# Altium PCB Mother Board.PcbDoc
Units mil, origin at the board's own origin, x right, y up, seen from the top; angles counter-clockwise.
Board outline 1840 x 4900 mil, 4 copper layers (Top Layer, Layer 1, Layer 2, Bottom Layer), stack 23.756 mil thick; 34 components, 33 nets, 379 pads, 98 vias.
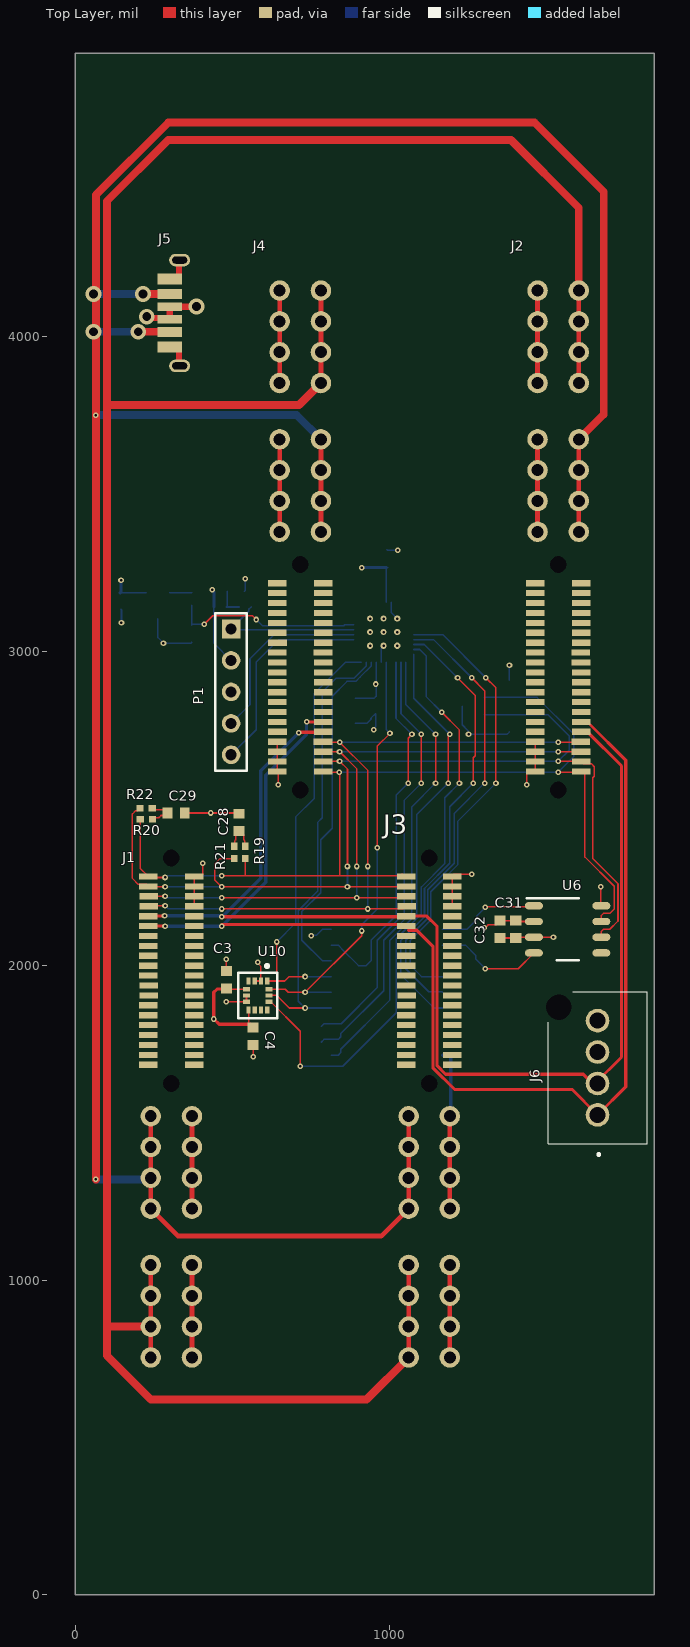
[diagram p0: Top Layer view]
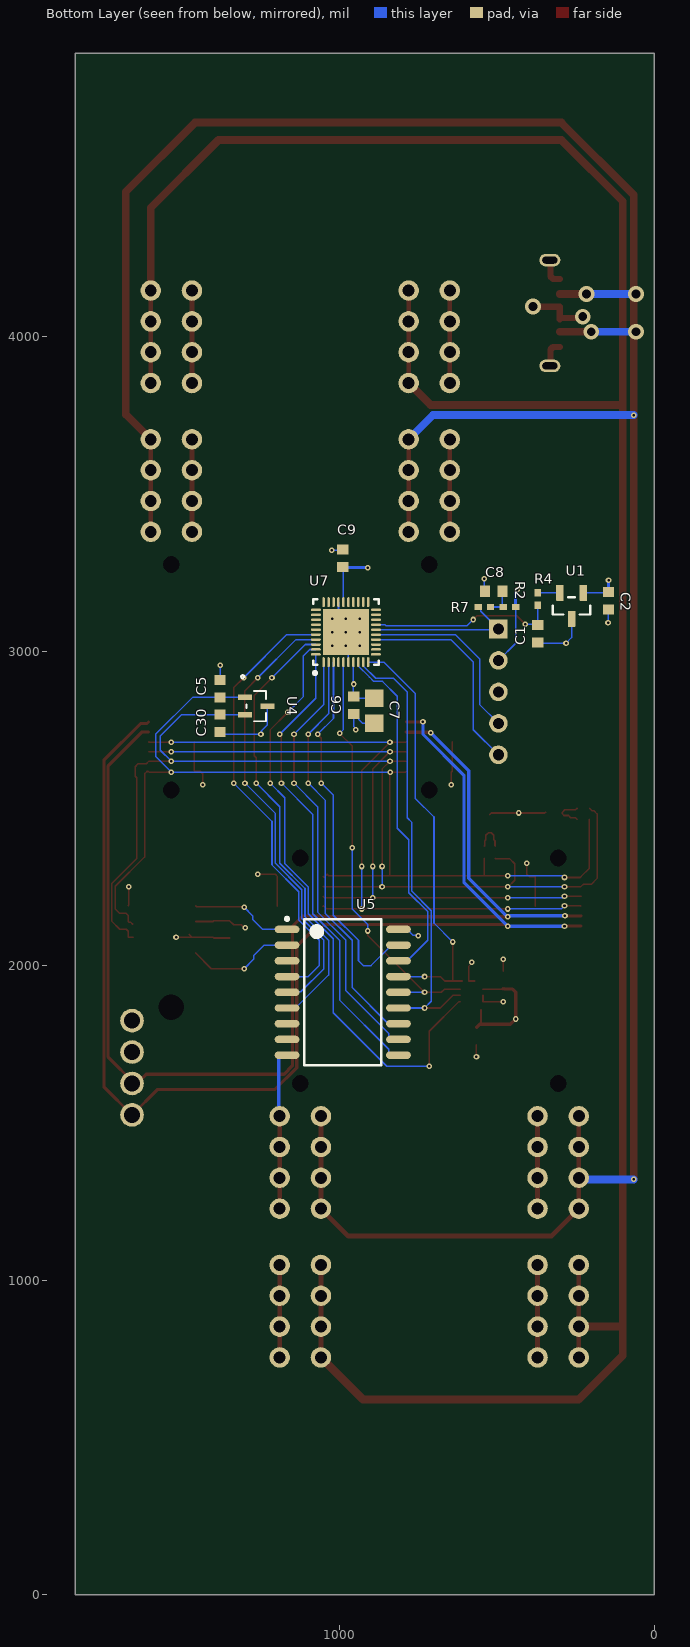
[diagram p1: Bottom Layer view, seen from below]
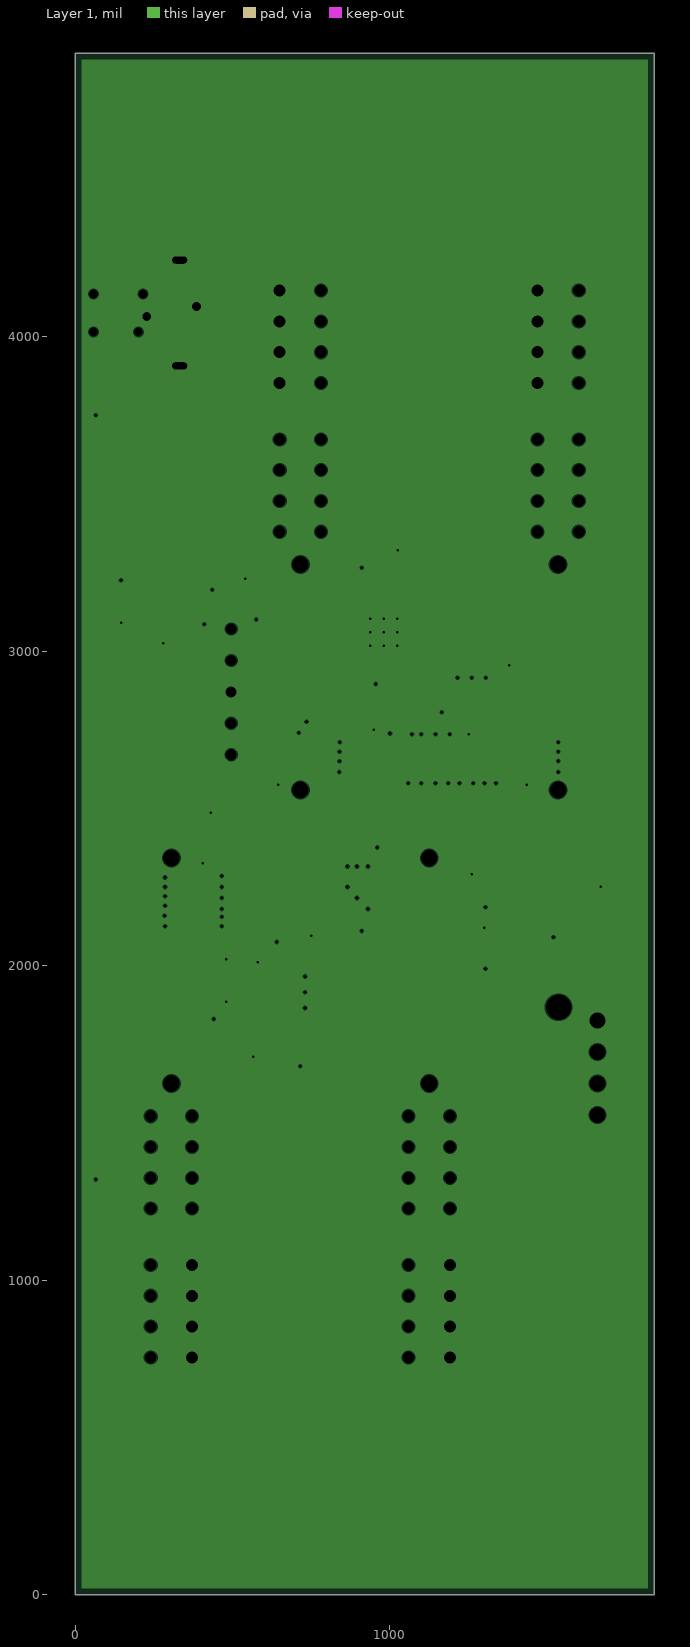
[diagram p2: Layer 1, clearances drawn from the general rule]
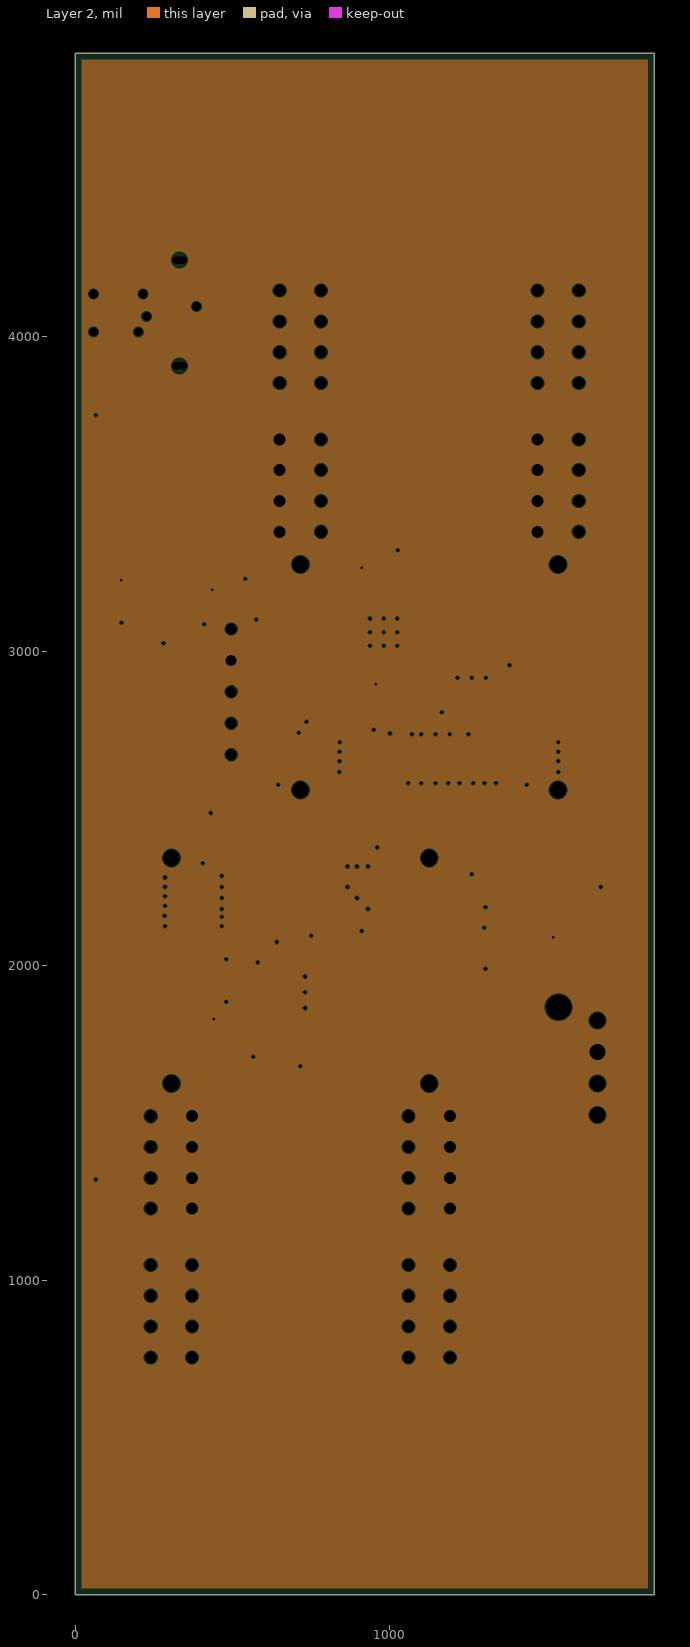
[diagram p3: Layer 2, clearances drawn from the general rule]

## Layer stack, top to bottom
Top Solder: solder mask 0.4, Solder Resist, Dk 3.5
Top Layer: signal copper 1.4
Dielectric 2: prepreg 2.8, PP-006, Dk 4.1
Layer 1: plane copper 1.378, net GND
Dielectric 1: dielectric 12.6, FR-4, Dk 4.8
Layer 2: plane copper 1.378, net 3V3
Dielectric 3: prepreg 2.8, PP-006, Dk 4.1
Bottom Layer: signal copper 1.4
Bottom Solder: solder mask 0.4, Solder Resist, Dk 3.5

## Board outline
0,0 1840,0 1840,4900 0,4900

## Design rules (kind name [scope] priority, off if disabled: settings)
BoardOutlineClearance [All] p1: gap=7.87 ignorepadtopadclearanceinfootprint=FALSE
Clearance [All] p1: gap=3.54 ignorepadtopadclearanceinfootprint=FALSE except(5: Arc-Via Track-Via SMDPad-Via THPad-Via Via-Via Via-Fill Via-Poly Via-Region Via-Text; 9.84: Arc-Hole Track-Hole SMDPad-Hole THPad-Hole Via-Hole Fill-Hole Poly-Hole Region-Hole Text-Hole)
ComponentClearance [All] p1: gap=3.5 collisioncheckmode=3 verticalgap=3.5 showdistances=TRUE
DiffPairsRouting 120OhmDiffPairs [InDifferentialPairClass('120Ohm')] p1: maxlimit=5 minlimit=5 mostfreqgap=5 toplayer_minwidth=2.63 toplayer_maxwidth=2.63 toplayer_prefwidth=2.63 bottomlayer_minwidth=2.63 bottomlayer_maxwidth=2.63 bottomlayer_prefwidth=2.63 impedanceprofiledriven=TRUE impedanceprofileid={E287B070-1990-45AA-885F-49F5262516A6} maxuncoupledlength=500
DiffPairsRouting 100OhmDiffPairs [InDifferentialPairClass('100Ohm')] p2: maxlimit=5 minlimit=5 mostfreqgap=5 toplayer_minwidth=4.51 toplayer_maxwidth=4.51 toplayer_prefwidth=4.51 bottomlayer_minwidth=4.51 bottomlayer_maxwidth=4.51 bottomlayer_prefwidth=4.51 impedanceprofiledriven=TRUE impedanceprofileid={2AE41D91-29D4-4592-BCE6-4F755B01D198} maxuncoupledlength=500
DiffPairsRouting 90OhmDiffPairs [InDifferentialPairClass('90Ohm')] p3: maxlimit=5 minlimit=5 mostfreqgap=5 toplayer_minwidth=5.85 toplayer_maxwidth=5.85 toplayer_prefwidth=5.85 bottomlayer_minwidth=5.85 bottomlayer_maxwidth=5.85 bottomlayer_prefwidth=5.85 impedanceprofiledriven=TRUE impedanceprofileid={0AC2A555-4B6F-4755-A2BA-0C0075E72B6B} maxuncoupledlength=500
DiffPairsRouting [All] p4: maxlimit=3.54 minlimit=3.54 mostfreqgap=3.54 toplayer_minwidth=3.54 toplayer_maxwidth=71497.94 toplayer_prefwidth=3.54 bottomlayer_minwidth=3.54 bottomlayer_maxwidth=71497.94 bottomlayer_prefwidth=3.54 maxuncoupledlength=500
Height [All] p1: minheight=0 maxheight=71497.94 prefheight=500
HoleSize [All] p1: absolutevalues=TRUE maxlimit=248.03 minlimit=7.87 maxpercent=80.000 minpercent=20.000
HoleToHoleClearance [All] p1: gap=9.84 allowstackedmicrovias=FALSE
MinimumAnnularRing [All] p1: minimumring=3
MinimumSolderMaskSliver [All] p1: minsoldermaskwidth=0
PlaneClearance [All] p1: clearance=3.5
PlaneConnect PlaneConnectPowerPads [InPadClass('PowerPads')] p1: planeconnectstyle=Direct reliefexpansion=20 reliefentries=4 reliefconductorwidth=10 reliefairgap=10
PlaneConnect [All] p2: pad.planeconnectstyle=Relief pad.reliefexpansion=11.81 pad.reliefentries=4 pad.reliefconductorwidth=3.5 pad.reliefairgap=3.5 via.planeconnectstyle=Direct via.reliefexpansion=11.81 via.reliefentries=4 via.reliefconductorwidth=5 via.reliefairgap=5
PolygonConnect PolygonConnectPowerPads [All vs (InPadClass('PowerPads'))] p1: connectstyle=Direct reliefconductorwidth=10 reliefentries=4 polygonreliefangle="90 Angle" airgapwidth=10
PolygonConnect [All] p2: thpad.connectstyle=Relief thpad.reliefconductorwidth=3.5 thpad.reliefentries=4 thpad.polygonreliefangle="90 Angle" thpad.airgapwidth=3.5 smdpad.connectstyle=Relief smdpad.reliefconductorwidth=3.5 smdpad.reliefentries=4 smdpad.polygonreliefangle="90 Angle" smdpad.airgapwidth=3.5 via.connectstyle=Direct via.reliefconductorwidth=5 via.reliefentries=4 via.polygonreliefangle="90 Angle" via.airgapwidth=5
ReturnPath 120OhmReturn [InDifferentialPairClass('120Ohm')] p1: impedanceprofileid={E287B070-1990-45AA-885F-49F5262516A6} _gaplimit=0 _useantipads=TRUE
ReturnPath 100OhmReturn [InDifferentialPairClass('100Ohm')] p2: impedanceprofileid={2AE41D91-29D4-4592-BCE6-4F755B01D198} _gaplimit=0 _useantipads=TRUE
ReturnPath 90OhmReturn [InDifferentialPairClass('90Ohm')] p3: impedanceprofileid={0AC2A555-4B6F-4755-A2BA-0C0075E72B6B} _gaplimit=0 _useantipads=TRUE
ReturnPath 60OhmReturn [InNetClass('60Ohm')] p4: impedanceprofileid={AA7C0548-6338-4AC9-AD2A-66174299CF1B} _gaplimit=0 _useantipads=TRUE
ReturnPath 50OhmReturn [InNetClass('50Ohm')] p5: impedanceprofileid={38A28C89-5808-4632-B31D-CFF1778F07F1} _gaplimit=0 _useantipads=TRUE
RoutingVias [All] p1: holewidth=7.87 width=17.72 viastyle="Through Hole" minholewidth=7.87 minwidth=17.72 maxholewidth=248.03 maxwidth=257.87
SilkToSilkClearance [All] p1: silktosilkclearance=0
SilkToSolderMaskClearance [IsPad] p1: minsilkscreentomaskgap=3.5 clearancetoexposedcopper=TRUE
SolderMaskExpansion ViaSolderMaskExpansion [IsVia] p1: expansion=4 istentingtop=TRUE
SolderMaskExpansion [All] p2: expansion=2.95 istentingtop=FALSE
Width 60OhmWidth [InNetClass('60Ohm')] p1: maxlimit=4.59 minlimit=4.59 preferedwidth=4.59 impedanceprofiledriven=TRUE impedanceprofileid={AA7C0548-6338-4AC9-AD2A-66174299CF1B} minimp=50.000000 maximp=50.000000 favimp=50.000000
Width 50OhmWidth [InNetClass('50Ohm')] p2: maxlimit=6.79 minlimit=6.79 preferedwidth=6.79
Width [All] p3: maxlimit=71497.94 minlimit=3.54 preferedwidth=3.54 minimp=50.000000 maximp=50.000000 favimp=50.000000
20 further rules are at their usual default settings.

## Classes and differential pairs
component class Designator: C28 C29 J1 J2 J3 J4 J5 J6 R19 R20 R21 R22
component class Designator3: *3_3
component class Designator2: *3_2
component class Designator1: *3_1

## Components (designator, comment, footprint, x,y, rotation, side; value= is the part's Value field where it differs from the comment)
C1 "Cap" 1608[0603] 370,3055 r270 bottom value=680pF
C2 "Cap" 1608[0603] 145,3160 r270 bottom value=100nF
C3 "Cap" 1608[0603] 480,1955 r270 top value=100nF
C4 "Cap" 1608[0603] 565,1775 r90 top value=100nF
C5 "Cap" 1608[0603] 1380,2880 r270 bottom value=100nF
C6 "Cap" 1608[0603] 955,2827.44 r90 bottom value=100nF
C7 "Cap" 6-0805_M 890,2810 r90 bottom value=10uF
C8 "Cap" 1608[0603] 510,3190 r180 bottom value=10nF
C9 "Cap" 1608[0603] 990,3295 r270 bottom value=100nF
C28 "Cap" 1608[0603] 520,2455 r90 top value=1nF
C29 "Cap" 1608[0603] 320,2485 r180 top value=1nF
C30 "Cap" 1608[0603] 1380,2770 r90 bottom value=100nF
C31 "Cap" 1608[0603] 1400,2115 r90 top value=100nF
C32 "Cap" 1608[0603] 1350,2115 r270 top value=1nF
J1 "HSEC8-120-01-L-PV-4-1" HSEC8-120-01-L-PV-4-1 305,1625 r90 top
J2 "HSEC8-120-01-L-PV-4-1" HSEC8-120-01-L-PV-4-1 1535,3275 r270 top
J3 "HSEC8-120-01-L-PV-4-1" HSEC8-120-01-L-PV-4-1 1125,1625 r90 top
J4 "HSEC8-120-01-L-PV-4-1" HSEC8-120-01-L-PV-4-1 715,3275 r270 top
J5 "USB4130-GF-C" USB4130-GF-C 331.5,4074.68 r270 top
J6 "2-644486-4" 26444864 1660,1525 r90 top locked
P1 "Header 5" HDR1X5 495,3070 r270 top
R2 "Res1" 0402-A 460,3140 r180 bottom value=10k
R4 "Res1" 0402-A 370,3165 r270 bottom value=0
R7 "Res1" 0402-A 540,3140 r180 bottom value=470
R19 "Res1" 0402-A 540,2360 r270 top value=60
R20 "Res1" 0402-A 225.31,2465 r180 top value=60
R21 "Res1" 0402-A 505,2360 r90 top value=60
R22 "Res1" 0402-A 225,2500 r0 top value=60
U1 "TMP235AQDBZTQ1" FP-DBZ0003A-MFG 262.4,3143.66 r270 bottom
U4 "D5V0L2B3W-7" SOT-323_DIO 1265,2825 r270 bottom
U5 "MCP2515-I/SO" SOIC-SO18_L 990,1915 r180 bottom
U6 "TCAN334DR" D0008A_N 1565,2115 r0 top value=Value
U7 "PIC16F15375-I/MV" PIC16F15375-I/MV 980,3060 r90 bottom
U10 "LSM6DSMTR" FP-LGA-14L-DM00249496-MFG 580,1905 r270 top

## Footprints (in the part's own frame and the unit in brackets; to place one, negate y for a bottom-side part, rotate by r counter-clockwise, add the part's x,y. Pads: shape width x height; smd on the part's side, far side on the other; paste and mask are expansions set on the pad)
6-0805_M [mm] "Chip Resistor, Body 2.0x1.2mm, IPC Low Density"
  rect 1.4x1.5 smd: 1(-1,0) 2(1,0)
  body extent -1.07,-0.7 1.07,0.7, height 0.7
0402-A [mm] "Chip Inductor, Body 1.0x0.5mm, IPC High Density"
  rect 0.6x0.5 smd: 1(-0.5,0) 2(0.5,0)
  body extent -0.55,-0.3 0.55,0.3, height 0.55
1608[0603] [mm] "Chip Capacitor, Body 1.6x0.8mm, IPC High Density"
  rect 0.8x0.9 smd: 1(-0.7,0) 2(0.7,0)
  body extent -0.87,-0.48 0.87,0.48, height 1.3
26444864 [mm]
  round 1.905 hole 1.27: 1(0,0) 2(2.54,0) 3(5.08,0) 4(7.62,0)
  round 1.028 hole 2.057 unplated: MH1(8.687,3.15)
  silkscreen extent -3.3,-4 9.95,3.98, body extent -2.26,-3.61 10.04,4.35, height 10.21
D0008A_N [mm]
  oval 1.45x0.6 smd paste+0 mask+0.051: 1(-2.725,1.905) 2(-2.725,0.635) 3(-2.725,-0.635) 4(-2.725,-1.905) 5(2.725,-1.905) 6(2.725,-0.635) 7(2.725,0.635) 8(2.725,1.905)
  silkscreen extent -3.3,-2.5 0.9,2.5, body extent 0,0 0.25,0.25, height 0.25
FP-DBZ0003A-MFG [mm]
  rrect17% 1.3x0.6 smd paste+0 mask+0: 1(-1.05,0.95) 2(-1.05,-0.95) 3(1.05,0)
  silkscreen extent -0.7,-1.52 0.7,1.52, body extent -1.18,-1.46 1.18,1.46, height 1.12
FP-LGA-14L-DM00249496-MFG [mm]
  rect 0.575x0.35 smd paste+0 mask+0: 1(-1.162,0.75) 2(-1.162,0.25) 3(-1.162,-0.25) 4(-1.162,-0.75) 8(1.162,-0.75) 9(1.162,-0.25) 10(1.162,0.25) 11(1.162,0.75)
  rect 0.35x0.575 smd paste+0 mask+0: 5(-0.5,-0.913) 6(0,-0.913) 7(0.5,-0.913) 12(0.5,0.913) 13(0,0.913) 14(-0.5,0.913)
  silkscreen extent -2.5,-1.58 1.83,1.58, body extent -2.05,-1.8 2.05,1.8, height 0.25
HDR1X5 [mm] "Connector; Header; 5 Position"
  rect 1.5x1.5 hole 0.9: 1(0,0)
  round 1.5 hole 0.9: 2(2.54,0) 3(5.08,0) 4(7.62,0) 5(10.16,0)
  silkscreen extent -1.27,-1.27 11.43,1.27
HSEC8-120-01-L-PV-4-1 [mil]
  round 65 hole 38: 0(-871,65.5) 0(-773,65.5) 0(-675,65.5) 0(-577,65.5) 1(-398,65.5) 1(-300,65.5) 1(-202,65.5) 1(-104,65.5) 22(-871,-65.5) 22(-773,-65.5) 22(-675,-65.5) 22(-577,-65.5) 23(-398,-65.5) 23(-300,-65.5) 23(-202,-65.5) 23(-104,-65.5)
  rect 19.68x59.06 smd: 2(59.5,72.75) 3(91,72.75) 4(122.5,72.75) 5(154,72.75) 6(185.5,72.75) 7(217,72.75) 8(248.5,73) 9(280,72.2) 10(311.5,72.45) 11(343,72.75) 12(374.5,72.75) 13(406,72.75) 14(437.5,72.75) 15(469,72.75) 16(500.5,72.75) 17(532,73) 18(563.5,72.2) 19(595,72.45) 20(626.5,72.75) 21(658,72.75) 24(59.5,-72.75) 25(91,-72.75) 26(122.5,-72.75) 27(154,-72.75) 28(185.5,-72.75) 29(217,-72.75) 30(248.5,-72.5) 31(280,-73.3) 32(311.5,-73.05) 33(343,-72.75) 34(374.5,-72.75) 35(406,-72.75) 36(437.5,-72.75) 37(469,-72.75) 38(500.5,-72.75) 39(532,-72.5) 40(563.5,-73.3) 41(595,-73.05) 42(626.5,-72.75) 43(658,-72.75)
  round 0 hole 53.15 unplated: ""(0,0) ""(717,0)
  body extent -972,-157 764,157, height 597
PIC16F15375-I/MV [mm]
  oval 0.8x0.2 smd: 1(-2.425,1.8) 2(-2.425,1.4) 3(-2.425,1) 4(-2.425,0.6) 5(-2.425,0.2) 6(-2.425,-0.2) 7(-2.425,-0.6) 8(-2.425,-1) 9(-2.425,-1.4) 10(-2.425,-1.8) 21(2.425,-1.8) 22(2.425,-1.4) 23(2.425,-1) 24(2.425,-0.6) 25(2.425,-0.2) 26(2.425,0.2) 27(2.425,0.6) 28(2.425,1) 29(2.425,1.4) 30(2.425,1.8)
  oval 0.2x0.8 smd: 11(-1.8,-2.425) 12(-1.4,-2.425) 13(-1,-2.425) 14(-0.6,-2.425) 15(-0.2,-2.425) 16(0.2,-2.425) 17(0.6,-2.425) 18(1,-2.425) 19(1.4,-2.425) 20(1.8,-2.425) 31(1.8,2.425) 32(1.4,2.425) 33(1,2.425) 34(0.6,2.425) 35(0.2,2.425) 36(-0.2,2.425) 37(-0.6,2.425) 38(-1,2.425) 39(-1.4,2.425) 40(-1.8,2.425)
  rect 3.7x3.7 smd: 41(0,0)
  silkscreen extent -3.42,-2.65 2.65,2.65, body extent -2.5,-2.5 2.5,2.5, height 0.55
SOIC-SO18_L [mm] "SOIC, 18-Leads, Body 11.6x7.5mm, Pitch 1.27mm, IPC High Density"
  oval 2x0.6 smd: 1(-4.5,5.08) 2(-4.5,3.81) 3(-4.5,2.54) 4(-4.5,1.27) 5(-4.5,0) 6(-4.5,-1.27) 7(-4.5,-2.54) 8(-4.5,-3.81) 9(-4.5,-5.08) 10(4.5,-5.08) 11(4.5,-3.81) 12(4.5,-2.54) 13(4.5,-1.27) 14(4.5,0) 15(4.5,1.27) 16(4.5,2.54) 17(4.5,3.81) 18(4.5,5.08)
  silkscreen extent -4.62,-5.9 3.1,6.05, body extent -3.8,-5.87 3.8,5.87, height 2.65
SOT-323_DIO [mm]
  rect 0.451x1.111 smd paste+0 mask+0: 1(-0.7,-0.9) 2(0.7,-0.9) 3(0,0.9)
  silkscreen extent -2.5,-1.23 1.23,0.8, body extent 0,0 0.25,0.25, height 0.25
USB4130-GF-C [mm]
  rect 0.9x2 smd: 1(-2.75,-0.8) 6(2.75,-0.8)
  rect 0.8x2 smd: 2(-1.52,-0.8) 5(1.52,-0.8)
  rect 0.7x2 smd: 3(-0.5,-0.8) 4(0.5,-0.8)
  oval 1x1.7 hole 0.55 slot 1.2 at 90 deg: 7(4.27,0) 8(-4.27,0)
  body extent -4.42,-1.5 4.32,1.65, height 6.5

## Part data
C1 C2 C3 C4 C5 C6 C7 C8 C9 C28 C29 C30 C31 C32: "Capacitor", LatestRevisionDate=17-Jul-2002, LatestRevisionNote="Re-released for DXP Platform.", PackageDescription="Radial Cap, Thru-Hole; 2 Leads; 0.3 in Pin Spacing", PackageReference=RAD-0.3, Published=8-Jun-2000, Publisher="Altium Limited"
J6: "Connector", Manufacturer_Name="TE Connectivity", Mouser Part Number=571-2-644486-4, Arrow Part Number=2-644486-4, Arrow Price/Stock=https://www.arrow.com/en/products/2-644486-4/te-connectivity, Datasheet Link=http://www.te.com/commerce/DocumentDelivery/DDEController?Action=showdoc&DocId=Customer+Drawing%7F644486%7FL%7Fpdf%7FEnglish%7FENG_CD_644486_L_baseFilename.pdf%7F2-644486-4.pdf, Height=10.668mm, Manufacturer_Part_Number=2-644486-4, Mouser Price/Stock=https://www.mouser.co.uk/ProductDetail/TE-Connectivity-AMP/2-644486-4?qs=8XyASyDp%2FcDn2y5ith8QSA%3D%3D
P1: "Header, 5-Pin", LatestRevisionDate=17-Jul-2002, LatestRevisionNote="Re-released for DXP Platform.", Publisher="Altium Limited"
R2 R4 R7 R19 R20 R21 R22: "Resistor", LatestRevisionDate=17-Jul-2002, LatestRevisionNote="Re-released for DXP Platform.", PackageDescription="Axial Device, Thru-Hole; 2 Leads; 0.3 in Pin Spacing", PackageReference=AXIAL-0.3, Published=8-Jun-2000, Publisher="Altium Limited"
U1: library part CMP-04948-000003-1, "LOW-POWER HIGH-ACCURACY ANALOG O", Ambient Temperature Range High=+150°C, Ambient Temperature Range Low=-40°C, Manufacturer="Texas Instruments", Manufacturer Part Number=TMP235A2DBZR, Max Supply Voltage=5.5V, Min Supply Voltage=2.3V, Operating Supply Current=9uA, Output Current=500uA, Package=DBZ0003A, Temperature="-40°C to +150°C", Accuracy=0.5%, Automotive=No, Category=IC, ComponentLink2Description=Datasheet, ComponentLink2URL=http://www.ti.com/lit/ds/symlink/tmp235.pdf, Device Class L1=Sensors, Device Class L2="Temperature and Humidity Sensors", Device Class L3=unset, Digikey Description="LOW-POWER HIGH-ACCURACY ANALOG O", Height=1.12mm, Lead Free=Yes, Max Junction Temp=+150°C, Mouser Description="±2°C Analog output temperature sensor, with 10mV /°C gain 3-SOT-23 -40 to 150", Octopart=https://octopart.com/tmp235a2dbzr-texas+instruments-94966376, RoHS=TRUE, Sensor Output="Analog Voltage", Standoff Height=0.01mm, Temperature Range High=+150°C, Temperature Range Low=-40°C
U4: "No Description Available", Built_By=EMA_UL_Team, Copyright="Copyright (C) 2018 Accelerated Designs. All rights reserved", Manufacturer_Part_Number=D5V0L2B3W-7, RefDes=RefDes, SourceLibrary=DIODESINC_2_2015-08-18, Type=DEV, Vendor="Diodes Inc"
U5: library part CMP-0186-00133-2, "Stand-Alone CAN Controller With SPI Interface, 18-Pin SOIC, Industrial Temperature", Code_JEDEC=MS-013, ComponentLink1Description="Manufacturer URL", ComponentLink1URL=http://www.microchip.com/, ComponentLink2Description=Datasheet, ComponentLink2URL=http://ww1.microchip.com/downloads/en/DeviceDoc/21801f.pdf, ComponentLink3Description="Package Specification", ComponentLink3URL=http://www.microchip.com/stellent/groups/techpub_sg/documents/packagingspec/en012702.pdf, DatasheetVersion="revF, Oct-2010", PackageDescription="18-Lead Plastic Small Outline (SO) - Wide 7.50mm Body [SOIC]", PackageReference=SOIC-SO18, PackageVersion="revBB, Aug-2009", RevisionNote="URLs added. DatasheetVersion updated."
U6: "No Description Available", Manufacturer="Texas Instruments", Copyright="Copyright (C) 2018 Accelerated Designs. All rights reserved", PartNumber=TCAN334DR, RefDes=RefDes, Type=DEV
U10: library part CMP-12177-000008-1, "IMU ACCEL/GYRO I2C/SPI 14LGA", Manufacturer=STMicroelectronics, Max Supply Voltage=3.6V, Min Supply Voltage=1.62V, Operating Supply Current=0.29-0.65mA, Package=LGA-14L-DM00249496, Temperature="-40°C to +85°C", Temperature Range High=+85°C, Temperature Range Low=-40°C, Accel Range=2/4/8/16g, Automotive=No, Category=IC, ComponentLink2Description=Datasheet, ComponentLink2URL=https://www.st.com/resource/en/datasheet/lsm6dsm.pdf, Device Class L1=Sensors, Device Class L2="Motion Sensors", Device Class L3="Inertial Measurement Units (IMUs)", Digikey Description="IMU ACCEL/GYRO I2C/SPI 14LGA", Footprint Url=https://www.st.com/content/ccc/resource/technical/document/technical_note/73/17/9c/16/dd/96/4a/01/CD00134799.pdf/files/CD00134799.pdf/jcr:content/translations/en.CD00134799.pdf, Gyro Range=125/250/500/1000/2000°/s, Height=0.86mm, Lead Free=Yes, Manufacturer Part Number=LSM6DSMTR, Mouser Description="LSM6DSM Series 3.6 V I2C/SPI 3D Accelerometer and 3D Gyroscope - LGA-14", Octopart=https://octopart.com/lsm6dsmtr-stmicroelectronics-66358194, Resolution=16bits, RoHS=TRUE, Sensor Output=I2C,SPI, Sensor Type=Temperature,Accelerometer,Gyroscope
J1 J2 J3 J4: Supplier 1=Mouser

## Via types
v1: diameter 18, hole 8, Top Layer to Bottom Layer, tented both sides, 81 vias
v2: diameter 19.68, hole 7.87, Top Layer to Bottom Layer, tented both sides, 9 vias
v3: diameter 50, hole 28, Top Layer to Bottom Layer, tented both sides, 6 vias
v4: diameter 17.72, hole 8, Top Layer to Bottom Layer, tented both sides, 2 vias

## Nets (pads, with @x,y where several pads share a name; then routed paths per layer and width w, separated by ;. In a path a pad name is that pad's centre, name@x,y a point inside that pad or via, vN(x,y) a via of type N, cw(c..) or ccw(c..) an arc to the next point about the centre after c; other vN are vias at no path point)
1V8: J1.0 J2.0 J3.0 J4.0 | length 8703.7
  Top Layer w15: J1.0@239.5,754 239.5,852 239.5,950 J1.0@239.5,1048 ; J4.0@779.25,4147.25 780.5,4146 780.5,4048 780.5,3950 J4.0@780.5,3852 ; J3.0@1059.5,754 1059.5,852 1059.5,950 J3.0@1059.5,1048 ; J2.0@1600.5,3852 1600.5,3950 1600.5,4048 J2.0@1600.5,4146
  Top Layer w25: J1.0@239.5,852 100,852 ; J4.0@780.5,3852 710.67,3782.17 100,3782.17 ; J3.0@1059.5,754 925.5,620 240,620 100,760 100,852 ; J2.0@1600.5,4146 1600.5,4409.5 1385,4625 295,4625 100,4430 100,3782.17 ; 100,852 100,3782.17
3V3: C2.1 C3.2 C4.2 C6.2 C7.2 C9.2 C31.1 C32.2 J1.23 J2.23 J3.23 J4.23 J6.3 P1.2 R2.2 U1.1 U5.9 U6.3 U7.7 U7.26 U10.5 U10.8 | length 2726.2
  Top Layer w5: C3.2 482.76,1924.68 U10.5 ; U10.8 550.47,1815.81 552.97,1813.31 563.72,1802.56 C4.2 ; J4.23@649.06,3672.56 J4.23@649.5,3673 ; C32.2 C31.1 1402.56,2090 U6.3 U6.3@1469.41,2090 ; U6.3@1478.01,2098.6 U6.3@1469.41,2090 ; v1(1520,2090) U6.3@1469.41,2090
  Top Layer w10: C3.2 477.56,1925 450,1925 440,1915 v1(440,1830) 440.56,1830 457.25,1813.31 552.97,1813.31 554.25,1813.31 C4.2
  Top Layer w15: J1.23@370.5,1227 370.5,1325 370.5,1423 J1.23@370.5,1521 ; J4.23@649.5,3379 649.5,3477 649.5,3575 J4.23@649.5,3673 ; J3.23@1190.5,1227 1190.5,1325 1190.5,1423 1190.5,1521 J3.23@1196.87,1514.63 ; J2.23@1469.5,3379 1469.5,3477 1469.5,3575 J2.23@1469.5,3673
  Bottom Layer w5: C2.1 147.56,3185 U1.1 ; R2.2 440.31,3024.69 P1.2 ; C7.2 949.37,2849.37 C6.2 956.38,2856.38 U7.7 ; U7.26 987.87,3265.32 C9.2 C9.2@992.87,3264.57
  Bottom Layer w10: C2.1@142.44,3185 C2.1 v1(145,3225) ; v1(435,3195) 435,3192.84 440.31,3187.52 R2.2 ; v1(910,3265) 987.56,3265 C9.2@987.87,3265.32 ; U5.9 1187.18,1715 1193.47,1708.71 1193.47,1523.97 J3.23@1190.5,1521
  other v1: 955,2895
5V0: J1.1 J2.1 J3.1 J4.1 J5.2 J5.5 | length 9230.7
  Top Layer w5: J1.1@238,1421.5 J1.1@239.5,1423
  Top Layer w15: J1.1@239.5,1521 239.5,1423 239.5,1325 239.5,1227 326.5,1140 972.5,1140 1059.5,1227 1059.5,1325 1059.5,1423 J3.1@1059.5,1521 ; J4.1@780.5,3379 780.5,3477 780.5,3575 J4.1@780.5,3673 ; J2.1@1600.5,3379 1600.5,3477 1600.5,3575 J2.1@1600.5,3673
  Top Layer w25: v4(65,1320) v4(65,3750) 65,4450 295,4680 1460,4680 1680,4460 1680,3752.5 J2.1@1600.5,3673 ; v3(200,4015) 200.08,4014.92 299.92,4014.92 J5.5 ; v3(215,4135) 215.24,4134.76 299.76,4134.76 J5.2
  Bottom Layer w25: v3(57.5,4015) v3(200,4015) ; v3(57.5,4135) v3(215,4135) ; v4(65,1320) 234.5,1320 J1.1@239.5,1325 ; v4(65,3750) 703.5,3750 J4.1@780.5,3673
18: J1.18 J2.18 J3.18 J4.18 | length 2218
  Top Layer w5: J1.18 234.3,2190 v1(285,2190) ; v1(465,2180) v1(930,2180) 1041.3,2180 1051.3,2190 J3.18 ; J4.18 788.7,2710 v1(840,2710) 930,2620 v1(930,2315) ; v1(1535,2710) 1605.7,2710 J2.18
  Bottom Layer w5: v1(285,2190) 295,2180 v1(465,2180) ; v1(840,2710) v1(1535,2710) ; v1(930,2180) v1(930,2315)
19: J1.19 J2.19 J3.19 J4.19 | length 2132.2
  Top Layer w5: J1.19 v1(285,2220) ; v1(465,2215) v1(895,2215) 1047.55,2215 J3.19 ; J4.19 787.66,2679.8 v1(839.8,2679.8) 840.2,2679.8 895,2625 v1(895,2315) ; v1(1535,2680) J2.19
  Bottom Layer w5: v1(285,2220) 290,2215 v1(465,2215) ; v1(839.8,2679.8) 840,2680 v1(1535,2680) ; v1(895,2215) v1(895,2315)
20: C30.2 J1.20 J2.20 J3.20 J4.20 R21.1 R22.1 U4.2 U6.6 | length 3570.5
  Top Layer w5: R22.1 197.97,2492.66 191.91,2492.66 181.32,2482.07 181.32,2276.88 199.36,2258.84 224.91,2258.84 J1.20 233.75,2250 v1(285,2250) ; R21.1 504.68,2340 460,2340 443.5,2323.5 443.5,2271.5 v1(465,2250) v1(865,2250) 1050.75,2250 J3.20 ; J4.20 789.05,2649.8 v1(839.8,2649.8) 865,2624.59 v1(865,2315) ; v1(1535,2650) 1606.25,2650 J2.20 1615.09,2641.16 1640.64,2641.16 1649.78,2632.02 1649.78,2601.98 1645,2597.2 1645,2340 1725,2260 1725,2141.6 1699.09,2115.69 1678.66,2115.69 1672.28,2109.31 U6.6 U6.6@1655.55,2090
  Bottom Layer w5: v1(285,2250) v1(465,2250) ; v1(839.8,2649.8) 840,2650 v1(1535,2650) 1535.41,2650 1570,2684.59 1570,2730 1502.44,2797.56 C30.2 1300.55,2797.56 U4.2 ; v1(865,2250) v1(865,2315)
21: C5.2 J1.21 J2.21 J3.21 J4.21 R19.2 R20.2 U4.1 U6.7 | length 3275.7
  Top Layer w5: R20.2 205.63,2309.62 J1.21 235.25,2280 v1(285,2280) ; v1(465,2285) 540,2285 ; R19.2 540,2285 ; J4.21 789.75,2615 v1(838.5,2615) 840,2613.5 840,2285 ; J3.21 1049.25,2280 1039.25,2290 1034.25,2285 840,2285 ; v1(1535,2615) 1605.75,2615 J2.21 1612.66,2617 1620,2609.66 1620,2345 1713.33,2251.67 1713.33,2179.93 1699.09,2165.69 1678.66,2165.69 1672.28,2159.31 U6.7 1670.57,2138.28 1664.94,2138.28 U6.7@1658.05,2131.4 ; 540,2285 840,2285
  Bottom Layer w5: v1(285,2280) 290,2285 v1(465,2285) ; v1(838.5,2615) v1(1535,2615) 1585,2665 1585,2735 1467.56,2852.44 C5.2 1300.55,2852.44 U4.1
BPDCRX: J1.17 J2.17 J3.17 J4.17 J6.2 | length 3907.5
  Top Layer w10: J1.17 232.75,2157.75 282.75,2157.75 v1(283.5,2158.5) ; v1(465,2155) 1050,2155 J3.17 1117.14,2157 1150,2124.14 1150,1680.8 1176.52,1654.28 1615.03,1654.28 1644.31,1625 J6.2@1652.15,1625 ; v1(710,2740) 711.5,2741.5 786.5,2741.5 J4.17 ; J2.17 1627.69,2743 1736.04,2634.64 1736.04,1708.89 J6.2@1652.15,1625 ; J6.2@1660,1637.37 J6.2 J6.2@1652.15,1625
  Bottom Layer w10: v1(283.5,2158.5) 459.34,2158.5 462.84,2155 v1(465,2155) 466.87,2155 589.27,2277.4 589.27,2619.27 v1(710,2740)
BPDCTX: J1.16 J2.16 J3.16 J4.16 J6.1 | length 4063.5
  Top Layer w10: J1.16 284.5,2125.5 v1(285,2125) ; v1@465,2130 1047.75,2130 J3.16 ; v1(735,2775) 735.25,2774.75 787.5,2774.75 J4.16 ; 1060,2112.39 1085.32,2112.39 1136.46,2061.25 1136.46,1675.19 1205.33,1606.31 1578.69,1606.31 J6.1 1749.59,1614.59 1749.59,2652.87 1632.8,2769.66 1612.59,2769.66 J2.16
  Bottom Layer w10: v1(285,2125) v1(465,2125) 605,2265 605,2605 735,2735 v1(735,2775)
GND: C1.2 C2.2 C3.1 C4.1 C5.1 C6.1 C7.1 C8.1 C9.1 C28.2 C29.1 C30.1 C31.2 C32.1 J1.22 J1.40 J1.41 J1.42 J1.43 J2.22 J2.40 J2.41 J2.42 J2.43 J3.22 J3.40 J3.41 J3.42 J3.43 J4.22 J4.40 J4.41 J4.42 J4.43 J5.1 J5.3 J5.4 J5.6 J5.7 J5.8 J6.4 P1.3 U1.3 U4.3 U5.18 U6.2 U6.8 U7.6 U7.27 U7.41 U10.2 U10.3 U10.6 U10.7 | length 3708.9
  Top Layer w5: C29.1@345,2487.56 C29.1 v1(430,2485) 517.56,2485 C28.2 C28.2@522.56,2480 ; J1.40 378.3,2282.45 J1.43 397.44,2283 405,2290.56 v1(405,2325) ; v1(480,1885) 480.16,1885.16 543.92,1885.16 U10.7 U10.6 ; C3.1 v1(480,2020) ; v1(565,1710) C4.1 ; U10.3 U10.2 589.84,1996.64 580,2006.48 v1(580,2010) ; J4.40 641.7,2680 641.7,2648.5 641.7,2617.55 645,2614.25 v1(645,2575) ; J3.40 1198.3,2282.45 J3.43 1204.75,2290 v1(1260,2290) ; v1(1300,2120) 1303.52,2120 1312.83,2129.31 1336.75,2129.31 C32.1 C31.2 1402.56,2140 U6.2 ; v1(1435,2575) 1435,2609.44 1443.11,2617.55 1461.7,2617.55 J2.40 ; v1(1670,2250) 1670,2192.28 U6.8
  Top Layer w15: J1.22@370.5,754 370.5,852 370.5,950 J1.22@370.5,1048 ; J4.22@649.5,3852 649.5,3950 649.5,4048 J4.22@649.5,4146 ; J3.22@1190.5,754 1190.5,852 1190.5,950 J3.22@1190.5,1048 ; J2.22@1469.5,3852 1469.5,3950 1469.5,4048 J2.22@1469.5,4146
  Top Layer w20: v3(226.71,4063.08) 231.01,4058.78 296.22,4058.78 J5.4 J5.3 300.31,4094.68 384.69,4094.68 v3(385,4095) ; J5.6 321.65,3966.42 329.37,3958.7 329.37,3908.7 J5.7 ; J5.1 321.65,4182.95 329.37,4190.67 329.37,4240.67 J5.8
  Bottom Layer w5: C2.2 146.5,3130.94 v1(146.5,3090) ; U1.3 262.4,3042.6 v1(280,3025) 367.56,3025 C1.2 ; C8.1 540,3192.44 v1(540,3230) ; v1(750,2095) 751.22,2096.22 766.5,2096.22 785.28,2115 U5.18 ; C7.1 927.03,2770.63 939.78,2783.39 939.78,2786.63 953.03,2799.88 C6.1 955,2760.02 948.5,2753.52 v1(948.5,2750) ; U7.6 972.13,3008.82 v2(980,3016.69) ; C9.1 992.56,3320 v1(1025,3320) ; U7.27 1003.62,3122.99 v2(1023.31,3103.31) ; U4.3 1229.57,2765.43 1248.33,2746.67 1248.33,2736.67 v1(1250,2735) 1372.56,2735 C30.1 ; C5.1 v1(1380,2955)
  other v2: 936.69,3016.69 1023.31,3016.69 936.69,3060 980,3060 1023.31,3060 936.69,3103.31 980,3103.31
NetC1_1: C1.1 R4.2 U7.17 | length 604.3
  Top Layer w5: v1(410,3085) 437.03,3112.03 562.97,3112.03 v1(575,3100)
  Bottom Layer w5: R4.2 C1.1 372.44,3085 v1(410,3085) ; v1(575,3100) 595,3080 852.76,3080 856.38,3083.62 U7.17
NetC8_2: C8.2 R2.1 R7.2 | length 91.8
  Bottom Layer w5: C8.2 482.44,3142.76 R2.1 R7.2
NetC28_1: C28.1 R19.1 R21.2 | length 105
  Top Layer w5: R21.2 506.07,2380.75 506.07,2396.07 510,2400 510,2414.19 518.25,2422.44 526.75,2422.44 535,2414.19 535,2400 538.93,2396.07 538.93,2380.75 R19.1
NetC29_2: C29.2 R20.1 R22.2 | length 111.9
  Top Layer w5: R22.2 249.69,2495 284.19,2495 292.44,2486.75 292.44,2483.03 286.53,2477.12 272.12,2477.12 265,2470 250,2470 R20.1
NetP1_1: P1.1 R7.1 U7.16 | length 487.9
  Bottom Layer w5: R7.1 558.55,3140 551.21,3132.66 551.21,3126.21 P1.1 497.13,3067.87 U7.16
NetP1_4: P1.4 U7.15 | length 591.3
  Bottom Layer w5: P1.4 555,2830 555,2975 632.13,3052.13 U7.15
NetP1_5: P1.5 U7.14 | length 667.2
  Bottom Layer w5: P1.5 575,2750 575,2965 646.38,3036.38 U7.14
NetR4_1: R4.1 U1.2 | length 70.6
  Bottom Layer w5: U1.2@300,3185.2 U1.2 369.68,3185 R4.1
NetU5_1: U5.1 U6.1 | length 328.4
  Top Layer w5: v1(1303.5,2185) 1305.99,2187.49 1455.2,2187.49 U6.1
  Bottom Layer w5: U5.1 1245,2115 1275.51,2145.51 1275.51,2157.01 v1(1303.5,2185)
NetU5_4: U5.4 U7.36 | length 1443.9
  Top Layer w5: v1(1305,2915) 1337,2883 v1(1337,2580)
  Bottom Layer w5: U7.36 1167.87,3052.13 v1(1305,2915) ; U5.4 1100,1965 1065,2000 1065,2080 1130,2145 1130,2235 1215,2320 1215,2458 v1(1337,2580)
NetU5_5: U5.5 U7.37 | length 1429
  Top Layer w5: v1(1260,2915) 1301,2874 v1(1301,2580)
  Bottom Layer w5: U7.37 1138.62,3036.38 v1(1260,2915) ; U5.5 1165.81,1916.35 1123.65,1916.35 1050,1990 1050,2080 1120,2150 1120,2240.86 1204.14,2325 1204.14,2483.14 v1(1301,2580)
NetU5_6: U5.6 U7.38 | length 1425.3
  Top Layer w5: v1(1215,2915) 1271.5,2858.5 1271.5,2666.96 1265,2660.46 v1(1265,2580)
  Bottom Layer w5: U7.38 1109.37,3020.63 v1(1215,2915) ; U5.6 1140,1865 1035,1970 1035,2080 1110,2155 1110,2245 1190,2325 1190,2505 v1(1265,2580)
NetU5_10: U5.10 U7.40 | length 1491
  Top Layer w5: v1(1185,2580) 1185,2730 v1(1190,2735)
  Bottom Layer w5: U5.10 835.35,1715 843.96,1723.6 843.96,1734.18 1000,1890.23 1000,2080 1085,2165 1085,2480 v1(1185,2580) ; U7.40 1075.47,2849.53 v1(1190,2735)
NetU5_11: U5.11 U7.1 | length 1424
  Top Layer w5: v1(1145,2580) v1(1145,2735)
  Bottom Layer w5: U5.11@781.71,1756.4 790.31,1765 U5.11 835.35,1765 843.96,1773.6 843.96,1784.18 980,1920.23 980,2080 1070,2170 1070,2505 v1(1145,2580) ; U7.1 1050.87,2829.13 v1(1145,2735)
NetU5_12: U5.12 U7.2 | length 1348.9
  Top Layer w5: v1(1100,2580) v1(1100,2735)
  Bottom Layer w5: U5.12@781.71,1806.4 790.31,1815 845,1815 960,1930 960,2080 1045,2165 1045,2525 v1(1100,2580) ; U7.2 1035.12,2800.29 1100,2735.41 v1(1100,2735)
NetU5_13: U5.13 U7.9 U10.13 | length 1445
  Top Layer w5: U10.13 640,1905 680,1865 v1(730,1865)
  Bottom Layer w5: U5.13 v1(730,1865) 708.5,1886.5 708.5,2174.34 770,2235.84 770,2455 785,2470 785,2870 828.34,2913.34 885.5,2913.34 924.88,2952.72 U7.9
NetU5_14: U5.14 U7.5 U10.14 | length 1367.3
  Top Layer w5: U10.14 666.8,1924.68 676.48,1915 v1(730,1915) 910,2095 v1(910,2110) ; v1(960,2375) 960,2698.04 v1(1000,2738.04)
  Bottom Layer w5: v1(730,1915) U5.14 ; v1(910,2110) 910,2129.59 960,2179.59 v1(960,2375) ; U7.5 987.87,2750.16 v1(1000,2738.04)
NetU5_15: U5.15 U7.10 U10.1 | length 1364
  Top Layer w5: U10.1 640,1950.77 ; v1(640,2075) 640,1950.77 ; v1(730,1965) 680,1965 665.77,1950.77 640,1950.77
  Bottom Layer w5: v1(640,2075) 699.96,2134.96 699.96,2472.14 760,2532.19 760,2865.86 858.67,2964.53 U7.10 ; v1(730,1965) U5.15
NetU5_16: U5.16 U7.8 | length 1111.9
  Bottom Layer w5: U5.16 785.28,2015 720,2080.28 720,2171.69 780,2231.69 780,2400 816.5,2436.5 816.5,2856.5 863.34,2903.34 891.25,2903.34 905.05,2917.14 940.63,2952.72 U7.8
NetU5_17: U5.17 U7.3 | length 1184.9
  Top Layer w5: v1(1058,2580) 1058,2723 v1(1070,2735)
  Bottom Layer w5: U5.17 835.35,2065 846.35,2054 846.35,2053.65 900,2000 925,2000 940,2015 940,2080 1020,2160 1020,2542 v1(1058,2580) ; U7.3 1019.37,2785.63 v1(1070,2735)
NetU6_5: U6.5
NetU7_39: U7.39 U10.12 | length 1934.2
  Top Layer w5: U10.12 620.35,1885.32 715,1790.67 v1(715,1680) ; v1(1165,2805) 1221,2749 v1(1221,2580)
  Bottom Layer w5: v1(715,1680) 850,1680 1020,1850 1020,2085 1100,2165 1100,2250 1174.26,2324.26 1174.26,2533.26 v1(1221,2580) ; U7.39 1095.01,3004.88 1115,2984.89 1115,2855 v1(1165,2805)
RXD: U5.2 U6.4 | length 349.1
  Top Layer w5: v1(1303.5,1990) 1407.72,1990 U6.4
  Bottom Layer w5: U5.2 1240,2065 1273.01,2031.99 1273.01,2020.49 v1(1303.5,1990)
pads on no net: J1. J1.2 J1.3 J1.4 J1.5 J1.6 J1.7 J1.8 J1.9 J1.10 J1.11 J1.12 J1.13 J1.14 J1.15 J1.24 J1.25 J1.26 J1.27 J1.28 J1.29 J1.30 J1.31 J1.32 J1.33 J1.34 J1.35 J1.36 J1.37 J1.38 J1.39 J2. J2.2 J2.3 J2.4 J2.5 J2.6 J2.7 J2.8 J2.9 J2.10 J2.11 J2.12 J2.13 J2.14 J2.15 J2.24 J2.25 J2.26 J2.27 J2.28 J2.29 J2.30 J2.31 J2.32 J2.33 J2.34 J2.35 J2.36 J2.37 J2.38 J2.39 J3. J3.2 J3.3 J3.4 J3.5 J3.6 J3.7 J3.8 J3.9 J3.10 J3.11 J3.12 J3.13 J3.14 J3.15 J3.24 J3.25 J3.26 J3.27 J3.28 J3.29 J3.30 J3.31 J3.32 J3.33 J3.34 J3.35 J3.36 J3.37 J3.38 J3.39 J4. J4.2 J4.3 J4.4 J4.5 J4.6 J4.7 J4.8 J4.9 J4.10 J4.11 J4.12 J4.13 J4.14 J4.15 J4.24 J4.25 J4.26 J4.27 J4.28 J4.29 J4.30 J4.31 J4.32 J4.33 J4.34 J4.35 J4.36 J4.37 J4.38 J4.39 J6.MH1 U5.3 U5.7 U5.8 U7.4 U7.11 U7.12 U7.13 U7.18 U7.19 U7.20 U7.21 U7.22 U7.23 U7.24 U7.25 U7.28 U7.29 U7.30 U7.31 U7.32 U7.33 U7.34 U7.35 U10.4 U10.9 U10.10 U10.11

## Polygon pours and split planes (outlines as drawn)
GND on Layer 1 (split plane): 1819.9,20.1 20.1,20.1 20.1,4879.9 1819.9,4879.9
3V3 on Layer 2 (split plane): 1819.9,20.1 20.1,20.1 20.1,4879.9 1819.9,4879.9

## Silkscreen, mask and mechanical layers (free items; w line width, h text height)
Mechanical 1:
  lines w0.5: 0,0 0,4900.25
PCB Outline:
  the board outline again, w10